# Altium PCB PCB.PcbDoc
Units mm, origin at the board's own origin, x right, y up, seen from the top; angles counter-clockwise.
Board outline 34 x 27 mm, 4 copper layers (L1 (SIGNAL), L2 (GND), L3 (GND), L4 (SINGAL)), stack 1.57 mm thick; 33 components, 27 nets, 149 pads, 60 vias.
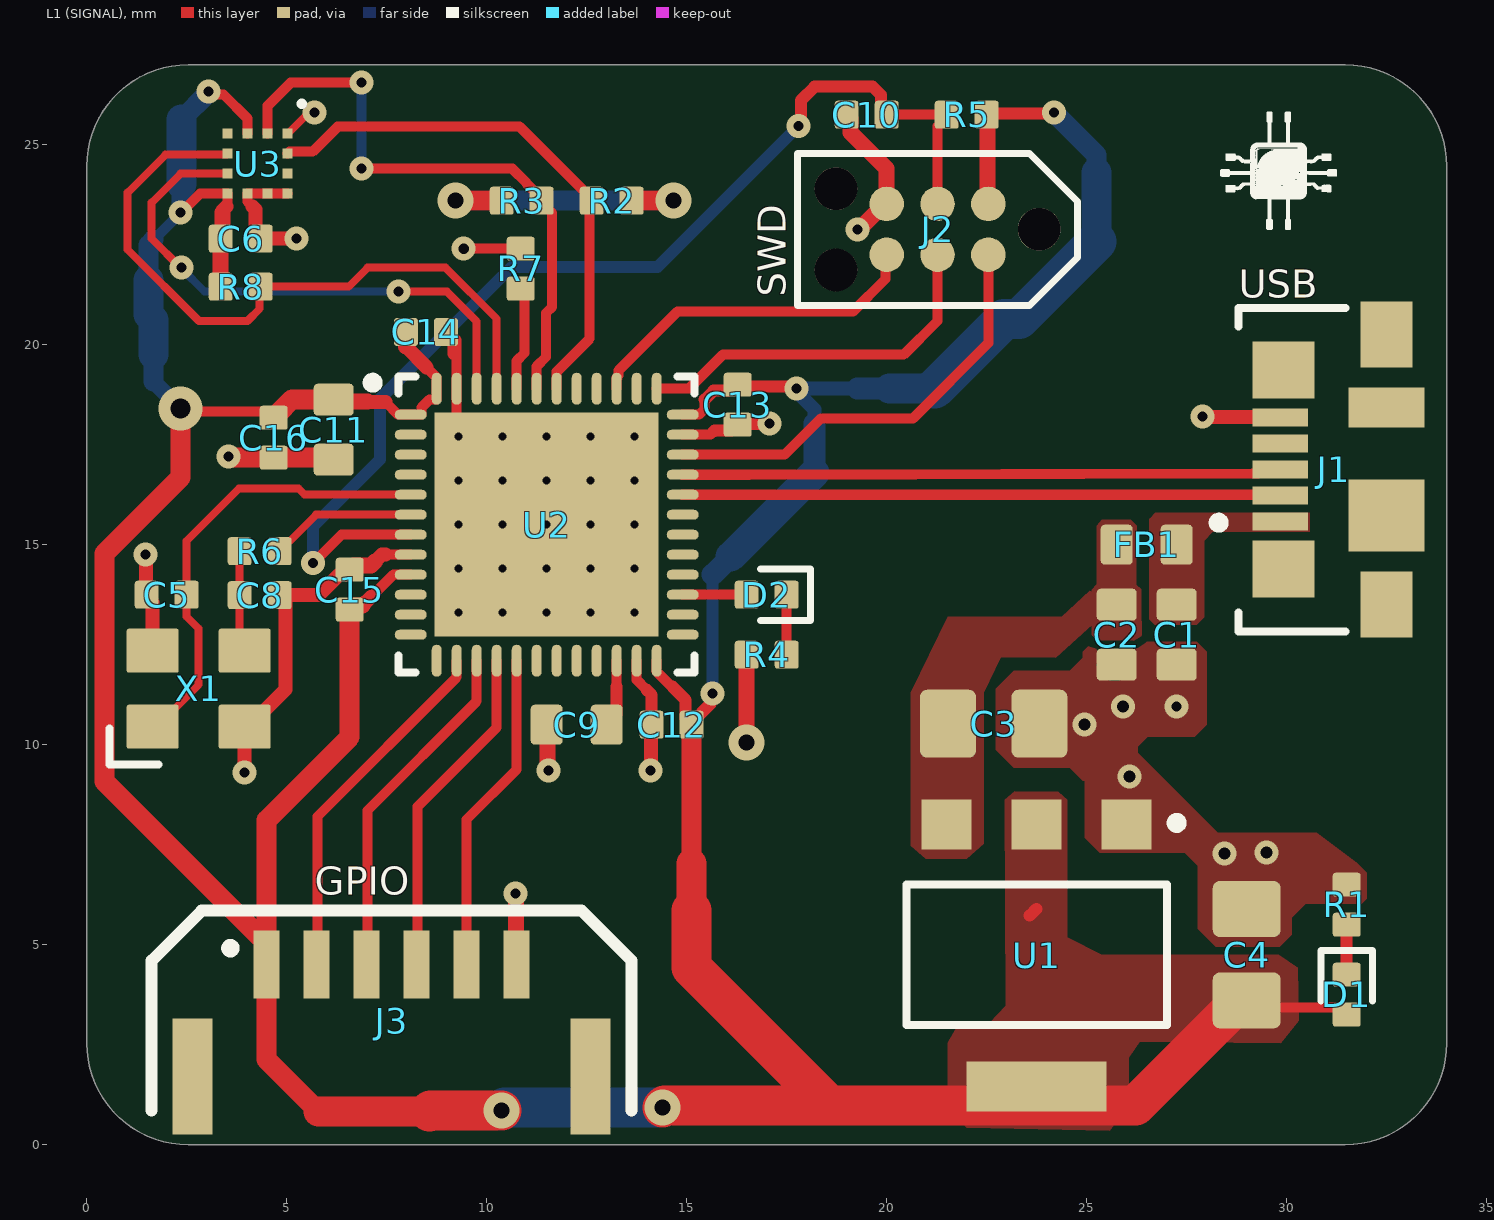
[diagram p0: L1 (SIGNAL) view]
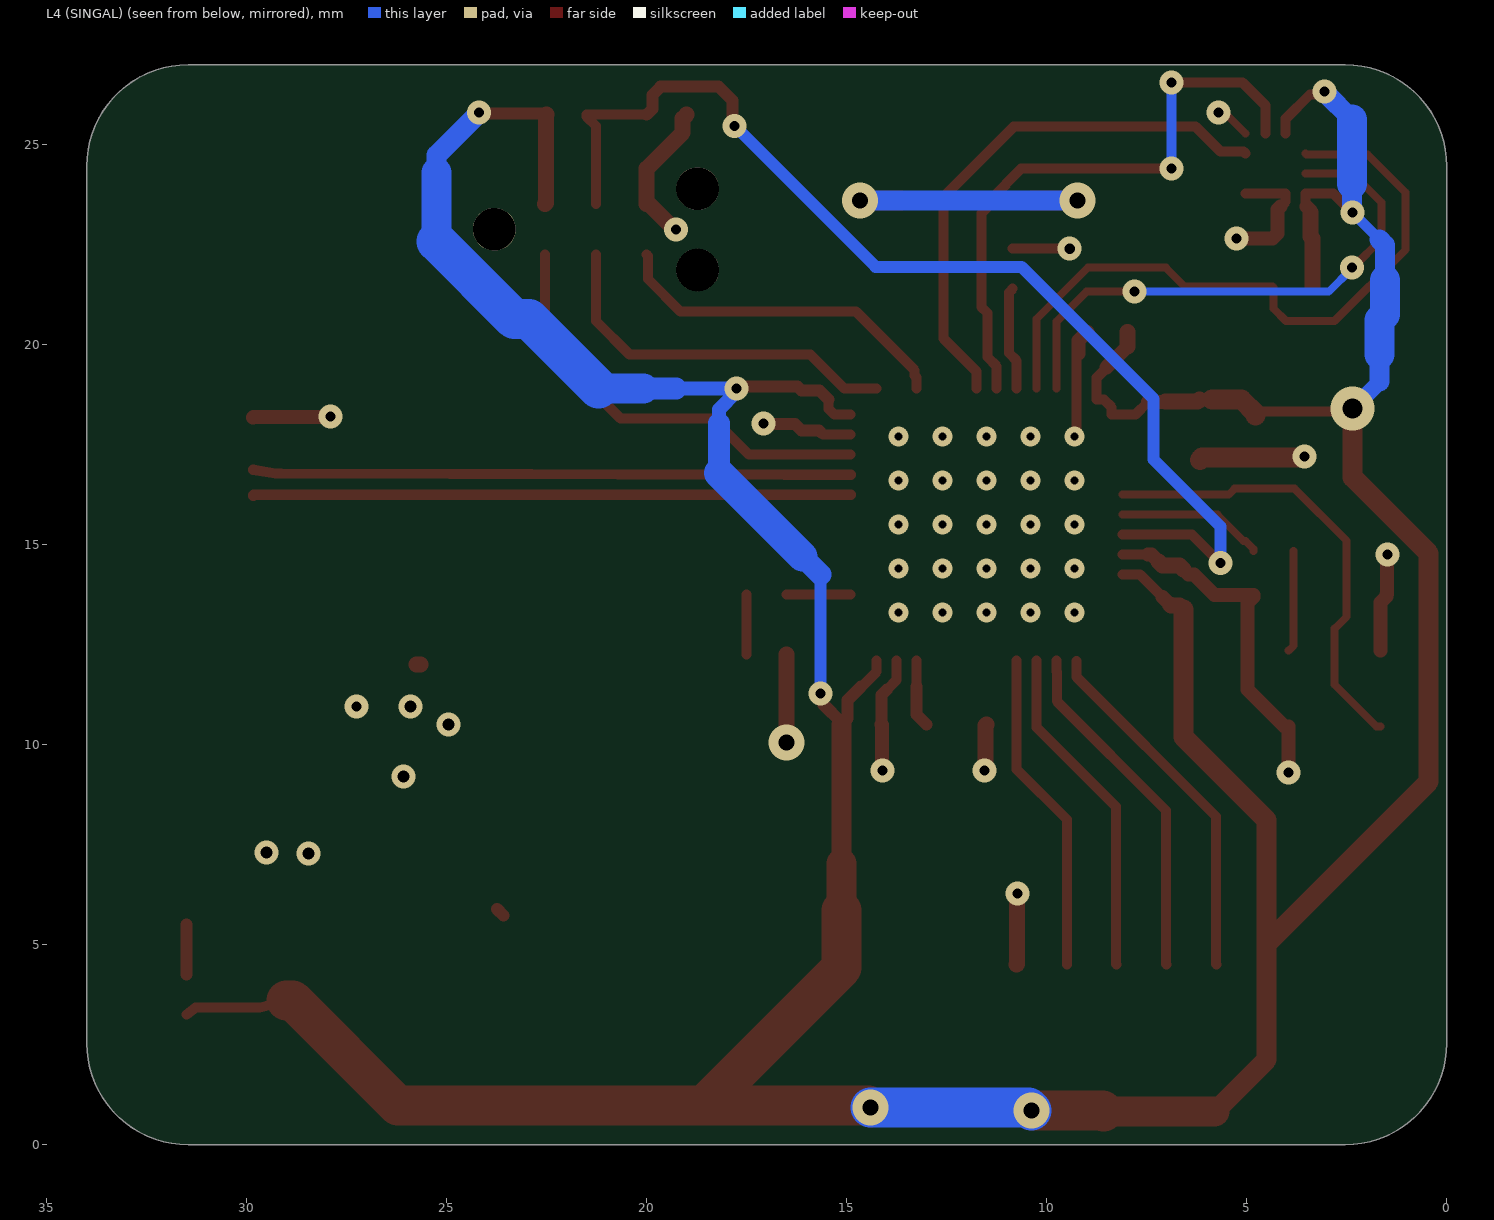
[diagram p1: L4 (SINGAL) view, seen from below]
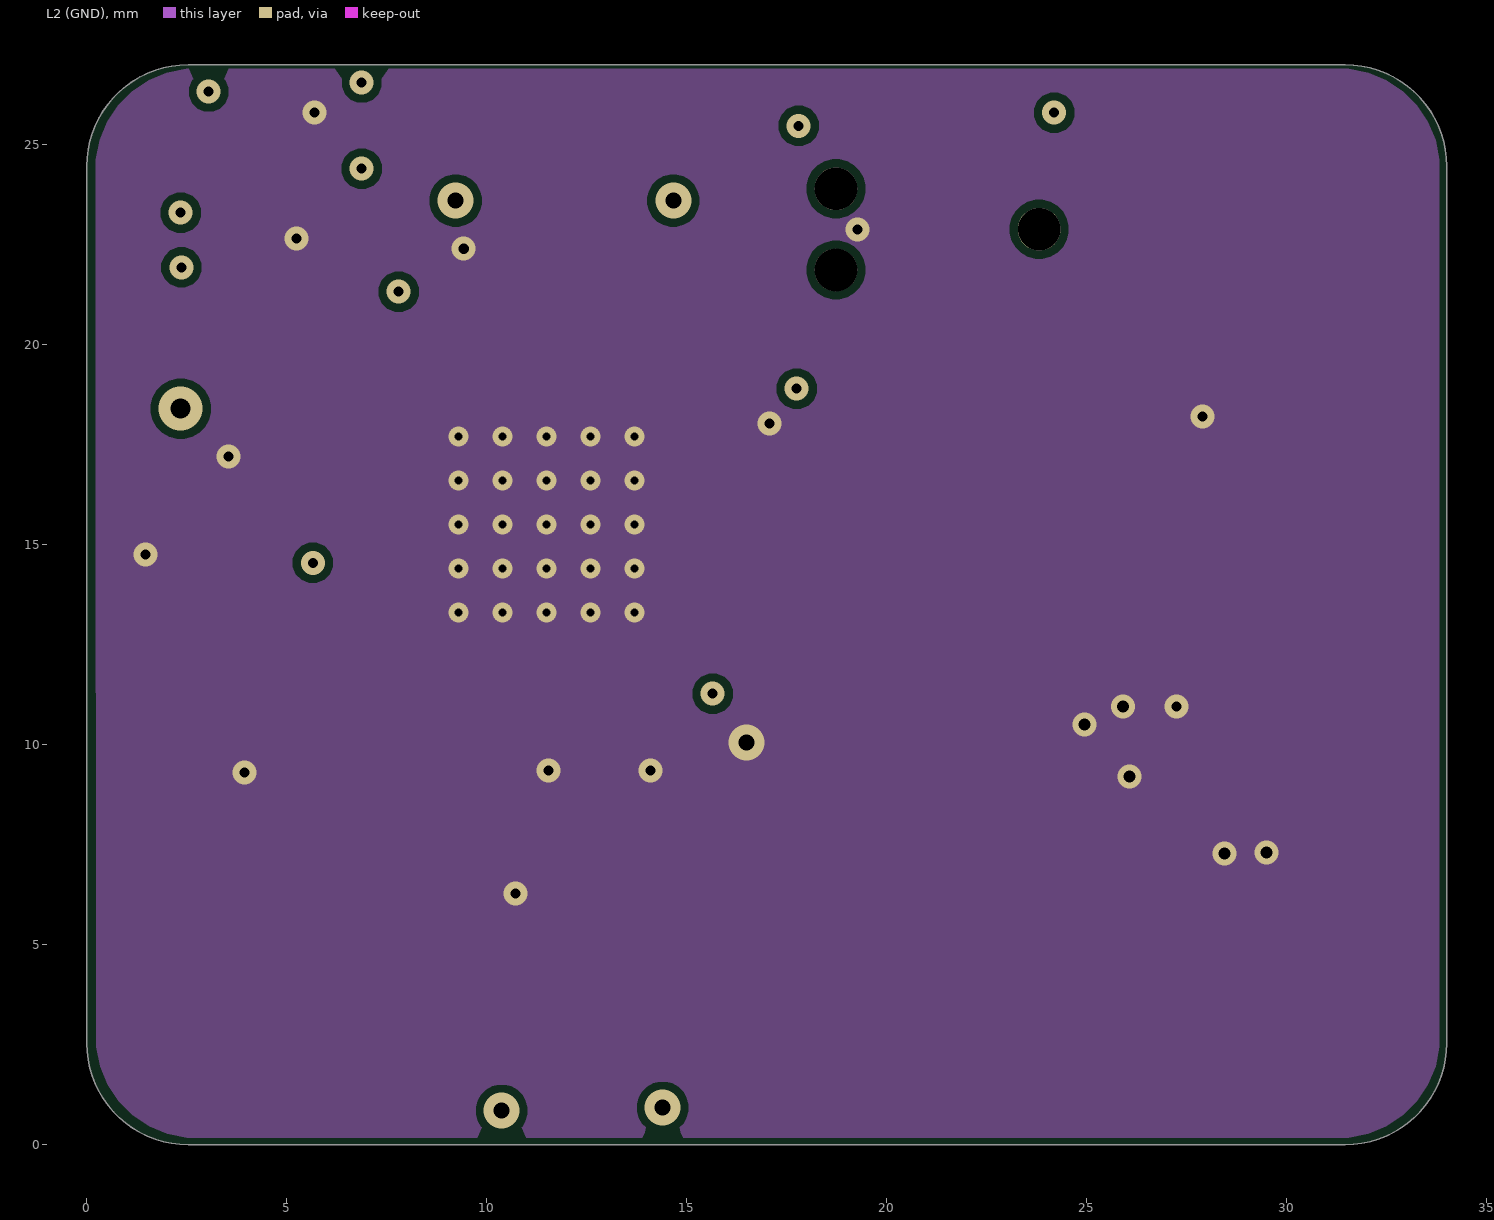
[diagram p2: L2 (GND)]
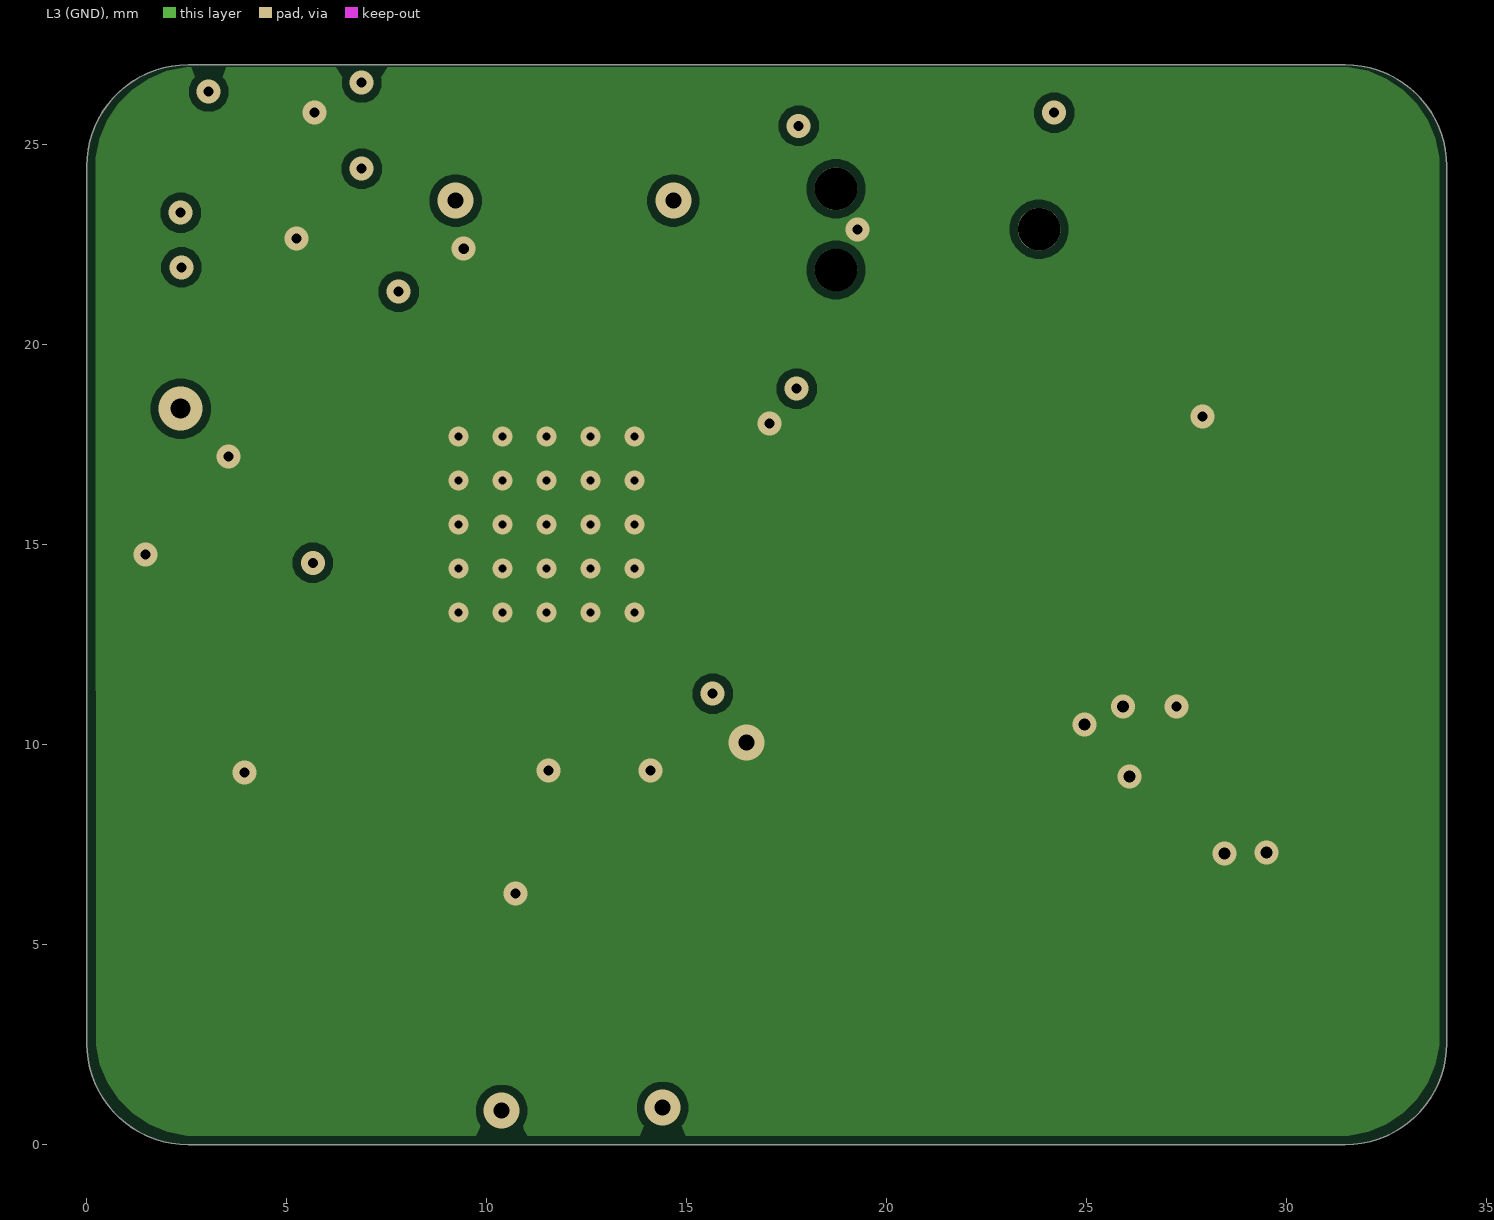
[diagram p3: L3 (GND)]
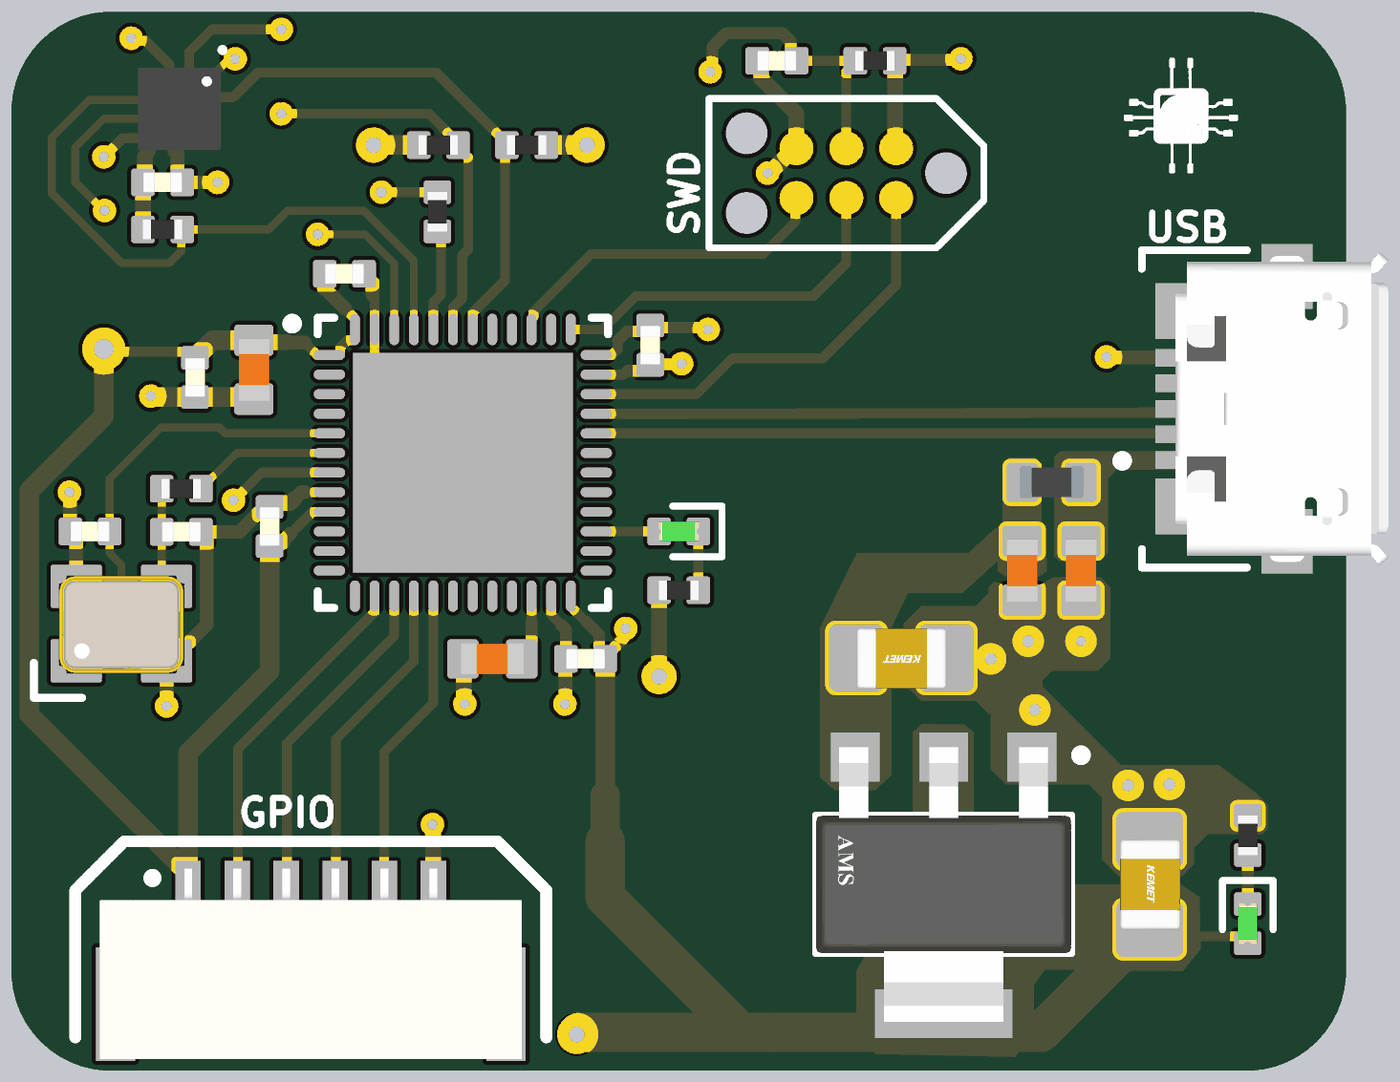
[diagram p4: 3D render of the assembled board from above, using the file's embedded part models]

## Layer stack, top to bottom
Top Solder: solder mask 0.0254, SM-001, Dk 4
L1 (SIGNAL): signal copper 0.035
Dielectric 1: prepreg 0.2, PP-017, Dk 4.6
L2 (GND): signal copper 0.0175
Dielectric 3: core 1.065, Core-039, Dk 4.6
L3 (GND): signal copper 0.0175
Dielectric 5: prepreg 0.2, PP-017, Dk 4.6
L4 (SINGAL): signal copper 0.035
Bottom Solder: solder mask 0.0254, SM-001, Dk 4

## Board outline
0,24.46 cw(c2.54,24.46) 2.54,27 31.46,27 cw(c31.46,24.46) 34,24.46 34,2.54 cw(c31.46,2.54) 31.46,0 2.54,0 cw(c2.54,2.54) 0,2.54

## Design rules (kind name [scope] priority, off if disabled: settings)
Clearance [All] p1: gap=0.2 ignorepadtopadclearanceinfootprint=FALSE
DiffPairsRouting [All] p1: maxlimit=0.254 minlimit=0.203 mostfreqgap=0.254 toplayer_maxgap=0.203 toplayer_prefgap=0.203 toplayer_minwidth=0.26 toplayer_maxwidth=0.26 toplayer_prefwidth=0.26 bottomlayer_maxgap=0.203 bottomlayer_prefgap=0.203 bottomlayer_minwidth=0.26 bottomlayer_maxwidth=0.26 bottomlayer_prefwidth=0.26 impedanceprofiledriven=TRUE impedanceprofileid={047612C2-1A66-4979-9F46-730870381391} impedanceprofilevalue=90.000000 maxuncoupledlength=12.7
PolygonConnect [All] p1: connectstyle=Direct reliefconductorwidth=0.254 reliefentries=4 polygonreliefangle="90 Angle" airgapwidth=0.254
RoutingVias [All] p1: holewidth=0.3 width=0.7 viastyle="Through Hole" minholewidth=0.25 minwidth=0.55 maxholewidth=0.4 maxwidth=0.9
SolderMaskExpansion [All] p1: expansion=0.102 istentingtop=FALSE
SupplyNets "Schematic Supply Nets_1" [InNet('+3V3')] p1: voltage=0.000
SupplyNets "Schematic Supply Nets_3" [InNet('+5V')] p2: voltage=0.000
SupplyNets "Schematic Supply Nets_2" [InNet('VBUS')] p3: voltage=0.000
SupplyNets "Schematic Supply Nets" [InNet('GND')] p4: voltage=0.000
UnRoutedNet [All] p1: checkbadconnections=TRUE
Width [All] p1: maxlimit=1 minlimit=0.2 preferedwidth=0.3 midlayer1_minwidth=0.254 midlayer1_maxwidth=0.254 midlayer1_prefwidth=0.254 midlayer2_minwidth=0.254 midlayer2_maxwidth=0.254 midlayer2_prefwidth=0.254 minimp=50.000000 maximp=50.000000 favimp=50.000000
28 further rules are at their usual default settings.

## Classes and differential pairs
net class DIFF_USB: USB_D_N USB_D_P
differential pair USB_D: +USB_D_P -USB_D_N

## Components (designator, comment, footprint, x,y, rotation, side; value= is the part's Value field where it differs from the comment)
C1 "2.2u" CAP_0603 27.25,12.75 r90 top
C2 "2.2u" CAP_0603 25.75,12.75 r90 top
C3 "22u" CAP_0805 22.675,10.525 r180 top
C4 "22u" CAP_0805 29,4.75 r270 top
C5 "10p" CAP_0402 2,13.75 r0 top
C6 "100n" CAP_0402 3.85,22.65 r180 top
C8 "10p" CAP_0402 4.325,13.738 r180 top
C9 "2u2" CAP_0603 12.25,10.5 r0 top
C10 "100n" CAP_0402 19.5,25.75 r0 top
C11 "2u2" CAP_0603 6.175,17.875 r90 top
C12 "100n" CAP_0402 14.625,10.5 r0 top
C13 "100n" CAP_0402 16.275,18.5 r90 top
C14 "100n" CAP_0402 8.483,20.319 r180 top
C15 "100n" CAP_0402 6.575,13.875 r270 top
C16 "100n" CAP_0402 4.675,17.675 r90 top
D1 "GREEN" LED_0402_GREEN 31.5,3.75 r90 top
D2 "GREEN" LED_0402_GREEN 17,13.75 r0 top
FB1 "FB0603" FB_0603 26.5,15 r180 top
J1 "473460001" FP-473460001-MFG 32.15,16.875 r90 top
J2 "TC2030-NL" TC2030-NL-FP 21.27,22.885 r180 top
J3 "SM06B-GHS-TB" SM06B-GHS-TB 7.625,3.1 r0 top
R1 "1k" RES_0402 31.5,6 r270 top
R2 "4k7" RES_0402 13.125,23.6 r0 top
R3 "4k7" RES_0402 10.875,23.6 r180 top
R4 "1k" RES_0402 17,12.25 r180 top
R5 "10k" RES_0402 22,25.75 r0 top
R6 "0R" RES_0402 4.325,14.838 r0 top
R7 "10k" RES_0402 10.85,21.9 r270 top
R8 "4k7" RES_0402 3.85,21.45 r180 top
U1 "ams1117" FP-ams1117-IPC_C 23.75,4.75 r270 top
U2 "STM32F411CEU6" STM-UFQFPN48_L 11.5,15.5 r0 top
U3 "498-MC6470" MC6470 4.275,24.525 r270 top
X1 "24MHz" XTAL_3225 2.8,11.4 r0 top

## Footprints (in the part's own frame and the unit in brackets; to place one, negate y for a bottom-side part, rotate by r counter-clockwise, add the part's x,y. Pads: shape width x height; smd on the part's side, far side on the other; paste and mask are expansions set on the pad)
CAP_0402 [mm]
  rrect25% 0.6x0.7 smd: 1(-0.5,0) 2(0.5,0)
  body extent -0.5,-0.26 0.5,0.26, height 0.37
CAP_0603 [mm]
  rrect25% 0.8x1 smd: 1(-0.75,0) 2(0.75,0)
  body extent -0.8,-0.4 0.8,0.4, height 0.51
CAP_0805 [mm]
  rrect25% 1.4x1.7 smd: 1(-1.143,0) 2(1.143,0)
  body extent -1.15,-0.76 1.15,0.79, height 1.01
FB_0603 [mm]
  rrect25% 0.8x1 smd: 1(-0.75,0) 2(0.75,0)
  body extent -0.8,-0.4 0.8,0.4, height 0.81
FP-473460001-MFG [mm]
  rect 0.45x1.38 smd paste+0 mask+0: 1(-1.3,2.31) 2(-0.65,2.31) 3(0,2.31) 4(0.65,2.31) 5(1.3,2.31)
  rect 1.425x1.55 smd paste+0 mask+0: 6(-2.488,2.225) 7(2.488,2.225)
  rect 1.65x1.3 smd paste+0 mask+0: 8(-3.375,-0.35) 11(3.375,-0.35)
  rect 1.8x1.9 smd paste+0 mask+0: 9(-1.15,-0.35)
  rect 1x1.9 smd paste+0 mask+0: 10(1.55,-0.35)
  silkscreen extent -4.05,0.67 4.05,3.97, body extent -4.3,-2.48 4.3,3.45, height 0.25
FP-ams1117-IPC_C [mm]
  rect 1.25x1.25 smd paste+0 mask+0: 1(-3.25,2.25) 2(-3.25,0) 3(-3.25,-2.25)
  rect 1.25x3.5 smd paste+0 mask+0: 4(3.295,0)
  silkscreen extent -3.42,-3.25 1.75,3.63, body extent -3.9,-3.35 3.9,3.35, height 0.25
LED_0402_GREEN [mm]
  rrect25% 0.6x0.7 smd: A(-0.5,0) K(0.5,0)
  silkscreen extent -0.15,-0.65 1.1,0.65, body extent -0.51,-0.25 0.51,0.25, height 0.45
MC6470 [mm] "LGA, 12-Leads, Body 2,00x2,00mmx0,13mm, Pitch 0,50mm"
  rect 0.25x0.25 smd: 1(-0.75,0.75) 2(-0.75,0.25) 3(-0.75,-0.25) 4(-0.75,-0.75) 5(-0.25,-0.75) 6(0.25,-0.75) 7(0.75,-0.75) 8(0.75,-0.25) 9(0.75,0.25) 10(0.75,0.75) 11(0.25,0.75) 12(-0.25,0.75)
  silkscreen extent -1.5,1.1 -1.5,1.1, body extent -1.05,-1.05 1.05,1.05, height 0.13
RES_0402 [mm]
  rrect25% 0.6x0.7 smd: 1(-0.5,0) 2(0.5,0)
  body extent -0.5,-0.25 0.5,0.25, height 0.3
SM06B-GHS-TB [mm]
  rect 0.65x1.7 smd: 1(-3.125,1.4) 2(-1.875,1.4) 3(-0.625,1.4) 4(0.625,1.4) 5(1.875,1.4) 6(3.125,1.4)
  rect 1x2.9 smd: ""(-4.975,-1.4) ""(4.975,-1.4)
  silkscreen extent -6,-2.25 6,2.75, body extent -5.38,-2.8 5.38,2.05, height 4.26
STM-UFQFPN48_L [mm] "QFN, 48-Leads, Body 7.1x7.1mm, Pitch 0.5mm, Thermal Pad 5.6x5.6mm, IPC High Density"
  oval 0.8x0.25 smd: 1(-3.4,2.75) 2(-3.4,2.25) 3(-3.4,1.75) 4(-3.4,1.25) 5(-3.4,0.75) 6(-3.4,0.25) 7(-3.4,-0.25) 8(-3.4,-0.75) 9(-3.4,-1.25) 10(-3.4,-1.75) 11(-3.4,-2.25) 12(-3.4,-2.75) 25(3.4,-2.75) 26(3.4,-2.25) 27(3.4,-1.75) 28(3.4,-1.25) 29(3.4,-0.75) 30(3.4,-0.25) 31(3.4,0.25) 32(3.4,0.75) 33(3.4,1.25) 34(3.4,1.75) 35(3.4,2.25) 36(3.4,2.75)
  oval 0.25x0.8 smd: 13(-2.75,-3.4) 14(-2.25,-3.4) 15(-1.75,-3.4) 16(-1.25,-3.4) 17(-0.75,-3.4) 18(-0.25,-3.4) 19(0.25,-3.4) 20(0.75,-3.4) 21(1.25,-3.4) 22(1.75,-3.4) 23(2.25,-3.4) 24(2.75,-3.4) 37(2.75,3.4) 38(2.25,3.4) 39(1.75,3.4) 40(1.25,3.4) 41(0.75,3.4) 42(0.25,3.4) 43(-0.25,3.4) 44(-0.75,3.4) 45(-1.25,3.4) 46(-1.75,3.4) 47(-2.25,3.4) 48(-2.75,3.4)
  rect 5.6x5.6 smd: 49(0,0)
  silkscreen extent -4.47,-3.7 3.7,3.7, body extent -3.55,-3.55 3.55,3.55, height 0.6
TC2030-NL-FP [mil]
  round 33.98 smd paste-16.99: 1(-50,-25) 2(-50,25) 3(0,-25) 4(0,25) 5(50,-25) 6(50,25)
  round 42.01 hole 42.01 unplated: MH(-100,0) MH(100,-40) MH(100,40)
  silkscreen extent -138,-75 138,75
XTAL_3225 [mm]
  rrect10% 1.3x1.1 smd: 1(-1.15,-0.95) 2(1.15,-0.95) 3(1.15,0.95) 4(-1.15,0.95)
  silkscreen extent -2.23,-1.89 -1,-1, body extent -1.6,-1.28 1.6,1.22, height 0.61

## Part data
C1 C2 C9 C11: library part CAP_0603, "Capacitor SMD 0603"
C3 C4: library part CAP_0805, "Capacitor SMD 0805"
C5 C6 C8 C10 C12 C13 C14 C15 C16: library part CAP_0402, "Capacitor SMD 0402"
D1 D2: library part LED_0402_GREEN, "LED 0402 GREEN SMD"
FB1: library part FB_0603, "Ferrite Bead SMD 0603"
J1: library part CMP-2000-05246-2, "CONN RCPT USB2.0 MICRO B SMD R/A", Current Rating=1.8A, Manufacturer=Molex, Package=0, Temperature="-30°C to +85°C", Temperature Range High=+85°C, Temperature Range Low=-30°C, Voltage Rating=30V, Automotive=No, Category=Conn, ComponentLink2Description=Datasheet, ComponentLink2URL=https://www.molex.com/webdocs/datasheets/pdf/en-us/0473460001_IO_CONNECTORS.pdf, Conn Orientation="Right Angle", Contact Material=Gold,Nickel, Device Class L1=Connectors, Device Class L2="USB Connectors", Device Class L3=unset, Digikey Description="CONN RCPT USB2.0 MICRO B SMD R/A", Footprint Url=https://www.molex.com/pdm_docs/sd/473460001_sd.pdf, Height=2.945mm, Lead Free=Yes, Manufacturer Part Number=473460001, Number Of Contacts=5, Octopart=https://octopart.com/47346-0001-molex-7164928, Pitch=0.65mm, RoHS=TRUE, Shielding=true, Usb Standard="USB 2.0", Is Female=yes
J2: "Tag-Connect No-Solder SWD Debug Connector (No Legs) DO NOT PLACE", Manufacturer=Tag-Connect, Manufacturer Part Number=TC2030-NL-FP
J3: "Header Connector 6 Position 1.25MM Pitch SMD Horizontal JST GH", Manufacturer=JST, Manufacturer Part Number=SM06B-GHS-TB
R1 R2 R3 R4 R5 R6 R7 R8: library part RES_0402, "Resistor SMD 0402"
U1: library part CMP-209535-000002-1, "1A LOW DROPOUT VOLTAGE REGULATOR", RoHS Compliant=Yes
U2: library part CMP-0243-00165-1, "ARM Cortex-M4 32-bit MCU+FPU, 512 KB Flash, 128 KB RAM, 36 I/Os, 48-Pin UFQFPN, -40 to 85 degC, Tray", Operating Frequency(F) (Processor speed) (MHz)=100, Package Description=UFQFPN48, Package Reference="48-Pin Ultra Thin Fine Pitch Quad Flat No-Lead, 7 x 7 x 0.6 mm Body, 0.5 mm Pitch, Exposed Pad", Supply Voltage(Vcc) min (V)=1.7, I/Os (High Current)=36, ComponentLink1Description="Manufacturer URL", ComponentLink1URL=http://www.st.com/, ComponentLink2Description=Datasheet, ComponentLink2URL=http://www.st.com/st-web-ui/static/active/en/resource/technical/document/datasheet/DM00115249.pdf, Core="ARM Cortex-M4", DatasheetVersion="Rev. 6", FLASH Size (Prog) (kB)=512, Mounting Technology="Surface Mount", Packing=Tray, Internal RAM Size (kB)=128
U3: library part MC6470, "IMUs - Inertial Measurement Units 8g, 14-Bit Output 6-Axis eCompass"
X1: library part TSX-3225_24.0000MF15X-AC, "Crystal SMD 24MHz 10PPM 7pF 3225", Manufacturer=Epson, Manufacturer Part Number="TSX-3225 24.0000MF15X-AC"

## Via types
v1: diameter 0.5, hole 0.2, L1 (SIGNAL) to L4 (SINGAL), 25 vias
v2: diameter 0.6, hole 0.25, L1 (SIGNAL) to L4 (SINGAL), 22 vias
v3: diameter 0.9, hole 0.4, L1 (SIGNAL) to L4 (SINGAL), 5 vias
v4: diameter 0.6, hole 0.3, L1 (SIGNAL) to L4 (SINGAL), 5 vias
v5: diameter 0.6, hole 0.27, L1 (SIGNAL) to L4 (SINGAL), 1 vias
v6: diameter 1.1, hole 0.5, L1 (SIGNAL) to L4 (SINGAL), 1 vias
v7: diameter 0.6/0.6/0.6/0.6 (per signal layer), hole 0.25, L1 (SIGNAL) to L4 (SINGAL), 1 vias

## Nets (pads, with @x,y where several pads share a name; then routed paths per layer and width w, separated by ;. In a path a pad name is that pad's centre, name@x,y a point inside that pad or via, vN(x,y) a via of type N, cw(c..) or ccw(c..) an arc to the next point about the centre after c; other vN are vias at no path point)
+3V3: C4.2 C6.2 C11.2 C12.2 C13.2 C14.2 C15.2 C16.2 D1.A J2.1 J3.1 R5.2 R8.2 U1.2 U1.4 U2.1 U2.9 U2.24 U2.36 U2.48 U3.3 U3.7 | length 124.6
  L1 (SIGNAL) w0.25: v6(2.35,18.4) 2.417,18.333 4.667,18.333 C16.2@4.775,18.225 ; v2(2.35,23.3) 2.355,23.3 2.83,23.775 U3.7 3.525,23.475 3.5,23.45 ; v2(3.05,26.325) 3.117,26.258 3.417,26.258 4.025,25.65 U3.3 ; 7.102,13.688 7.663,14.25 U2.9 ; 7.469,18.567 7.785,18.25 U2.1 8.375,18.25 8.375,18.435 8.565,18.625 8.75,18.625 U2.48 8.75,19.175 8.55,19.375 8.55,19.386 8.5,19.436 ; U2.24 14.25,11.825 14.625,11.45 ; U2.36 15.304,18.25 15.45,18.396 15.45,18.625 ; C4.2 29.675,3.425 31.275,3.425 D1.A
  L1 (SIGNAL) w0.3: 14.644,11.45 14.975,11.119 14.975,10.65 C12.2 ; C12.2@15.125,10.55 15.593,11.018 15.593,11.218 v2(15.65,11.275) ; 15.45,18.625 15.675,18.85 16.125,18.85 16.225,18.95 17.7,18.95 v2(17.75,18.9) ; R5.2 22.525,25.775 24.162,25.775 v2(24.187,25.8) ; 23.575,5.725 23.743,5.893
  L1 (SIGNAL) w0.35: 3.4,23.3 3.4,23.35 3.5,23.45 ; C15.2@6.913,13.5 7.102,13.688 ; 7.033,18.567 7.469,18.567 ; 7.983,19.954 8.5,19.436
  L1 (SIGNAL) w0.4: R8.2 C6.2 3.4,22.7 3.4,23.3 ; C11.2 6.225,18.575 7.025,18.575 ; C15.2 6.675,13.475 6.888,13.475 C15.2@6.913,13.5 ; 7.983,19.954 C14.2 ; R5.2 22.52,25.73 22.52,23.54 J2.1
  L1 (SIGNAL) w0.5: v6(2.35,18.4) 2.35,16.686 0.45,14.786 0.45,9.075 J3.1@4.5,5.025 ; C16.2@4.775,18.225 4.775,18.275 5.129,18.629 C11.2@5.871,18.629 ; 5.8,0.825 4.5,2.125 J3.1 J3.1@4.5,5.025 ; C15.2 6.575,10.188 4.5,8.112 J3.1@4.5,5.025 ; 15.125,7.025 C12.2
  L1 (SIGNAL) w0.75: 5.8,0.825 8.575,0.825 ; 15.125,5.85 15.125,7.025
  L1 (SIGNAL) w1: 8.575,0.825 8.6,0.85 v3(10.375,0.85) ; v3(14.4,0.925) 14.45,0.975 18.575,0.975 ; 15.125,5.85 15.125,4.425 18.575,0.975 ; C4.2 28.85,3.607 26.218,0.975 18.575,0.975
  L4 (SINGAL) w0.25: 1.675,22.625 v2(2.35,23.3)
  L4 (SINGAL) w0.3: v2(15.65,11.275) 15.65,14.25
  L4 (SINGAL) w0.35: 18.196,18.025 18.196,18.386 17.75,18.832 v2(17.75,18.9) 19.264,18.9
  L4 (SINGAL) w0.4: 1.675,19.075 v6(2.35,18.4)
  L4 (SINGAL) w0.5: 1.544,21.619 1.544,22.494 1.675,22.625 ; 1.675,19.075 1.675,19.75 ; v2(2.35,23.3) 2.369,23.319 2.369,24.019 ; 2.369,25.629 3.05,26.31 v2(3.05,26.325) ; v2(24.187,25.8) 25.25,24.737 25.25,24.3
  L4 (SINGAL) w0.55: 15.65,14.25 16.1,14.7 ; 18.196,16.796 18.196,18.025 ; 19.264,18.9 20.075,18.9
  L4 (SINGAL) w0.75: 1.544,21.619 1.544,20.75 1.675,20.619 1.675,19.75 ; 2.369,24.019 2.369,25.629 ; 16.1,14.7 18.196,16.796 ; 20.075,18.9 21.2,18.9 ; 25.25,22.581 25.25,24.3
  L4 (SINGAL) w1: v3(10.375,0.85) 10.45,0.925 v3(14.4,0.925) ; 21.2,18.9 22.937,20.637 23.306,20.637 25.25,22.581
+5V: C2.2 C3.2 FB1.2 U1.3
GND: C1.1 C2.1 C3.1 C4.1 C5.1 C6.1 C8.1 C9.1 C10.1 C11.1 C12.1 C13.1 C14.1 C15.1 C16.1 J1.5 J2.5 J3.6 R1.1 R4.2 R7.1 U1.1 U2.8 U2.23 U2.35 U2.47 U2.49 U3.1 U3.8 U3.9 U3.10 X1.2 X1.4 | length 37.9
  L1 (SIGNAL) w0.2: U3.1 5.473,25.723 5.623,25.723 v2(5.7,25.8)
  L1 (SIGNAL) w0.25: 4.15,23.45 4.025,23.575 U3.8 U3.9 U3.10 ; 7.469,14.75 U2.8 ; 9.2,19.786 9.25,19.736 U2.47 9.25,17.75 v1(9.3,17.7) ; v5(9.425,22.4) R7.1 ; U2.23 13.75,11.622 13.996,11.376 ; U2.35 15.597,17.75 15.673,17.827
  L1 (SIGNAL) w0.3: 13.996,11.376 14.125,11.247 C12.1 ; 15.673,17.827 15.697,17.85 16.125,17.85 C13.1 16.288,18.013 17.063,18.013 v2(17.075,18.025)
  L1 (SIGNAL) w0.35: v2(1.475,14.75) 1.488,14.737 1.488,13.762 C5.1 ; C5.1@1.5,13.7 1.65,13.55 X1.4 ; v2(3.95,9.3) X1.2 ; X1.2@4.05,10.45 4.975,11.375 4.975,13.538 4.825,13.688 C8.1 5.802,13.738 6.314,14.25 6.45,14.25 C15.1 ; 4.15,23.45 4.225,23.375 4.225,22.775 C6.1 v2(5.25,22.65) ; 7.209,14.583 7.377,14.75 7.469,14.75 ; C14.1 9.2,20.101 9.2,19.786 ; v2(14.1,9.35) 14.112,9.362 14.112,10.488 C12.1 ; v2(27.9,18.2) 27.912,18.187 29.827,18.187 J1.5
  L1 (SIGNAL) w0.4: C15.1 6.675,14.475 7.102,14.475 7.209,14.583 ; v2(10.725,6.275) 10.737,6.262 10.737,4.513 J3.6 ; C9.1 11.525,10.475 11.525,9.375 v2(11.55,9.35) ; v3(16.5,10.05) R4.2 ; C10.1 19.1,25.65 19.1,25.3 20,24.4 J2.5 19.949,23.52 19.314,22.885 v2(19.264,22.885) ; C2.1@25.65,12 C2.1
  L1 (SIGNAL) w0.5: v2(3.55,17.2) ccw(c3.575,17.2) 3.575,17.175 C16.1 6.12,17.175 C11.1@6.172,17.122
  other v1: 9.3,13.3 10.4,13.3 11.5,13.3 12.6,13.3 13.7,13.3 9.3,14.4 10.4,14.4 11.5,14.4 12.6,14.4 13.7,14.4 9.3,15.5 10.4,15.5 11.5,15.5 12.6,15.5 13.7,15.5 9.3,16.6 10.4,16.6 11.5,16.6 12.6,16.6 13.7,16.6 10.4,17.7 11.5,17.7 12.6,17.7 13.7,17.7
  other v2: 27.25,10.95
  other v4: 28.45,7.275 29.5,7.3 26.075,9.2 24.95,10.5 25.906,10.95
LED_PWR_K: D1.K R1.2 | length 1.2
  L1 (SIGNAL) w0.3: D1.K R1.2
MCU_BOOT0: R7.2 U2.44 | length 2.6
  L1 (SIGNAL) w0.25: U2.44 10.75,19.598 10.943,19.791 10.943,21.307 R7.2
MCU_INTA: R8.1 U2.45 U3.5 | length 17.4
  L1 (SIGNAL) w0.2: U3.5 3.5,24.75 1.975,24.75 1.025,23.8 1.025,22.375 2.806,20.594 4.019,20.594 4.325,20.9 4.325,21.425 R8.1 6.549,21.45 7.024,21.925 8.972,21.925 10.25,20.647 U2.45
MCU_INTM: U2.46 U3.6 | length 13.8
  L1 (SIGNAL) w0.2: v2(2.369,21.932) 2.343,21.932 1.625,22.65 1.625,23.55 2.35,24.275 U3.6 ; v7(7.8,21.325) 9.007,21.325 9.75,20.582 U2.46
  L4 (SINGAL) w0.2: v2(2.369,21.932) 2.369,21.906 2.95,21.325 v7(7.8,21.325)
MCU_LED_A: D2.A U2.27 | length 1.6
  L1 (SIGNAL) w0.25: U2.27 D2.A
MCU_LED_K: D2.K R4.1 | length 1.5
  L1 (SIGNAL) w0.25: R4.1 D2.K
MCU_NRST: C10.2 J2.3 R5.1 U2.7 | length 28.1
  L1 (SIGNAL) w0.25: v2(5.656,14.547) 5.667,14.547 6.37,15.25 U2.7 ; C10.2 R5.1 21.5,25.7 21.27,25.47 J2.3
  L1 (SIGNAL) w0.3: v2(17.8,25.47) 17.857,25.527 17.857,26.107 18.2,26.45 19.65,26.45 19.854,26.246 19.854,25.896 C10.2
  L4 (SINGAL) w0.3: v2(5.656,14.547) 5.661,14.552 5.661,15.458 7.328,17.125 7.328,18.643 10.629,21.945 14.275,21.945 v2(17.8,25.47)
MCU_OSC_IN: C5.2 U2.5 X1.1 | length 11.5
  L1 (SIGNAL) w0.2: X1.1 1.75,10.45 2.8,11.5 2.8,12.9 2.5,13.2 C5.2 2.5,15.097 3.803,16.4 5.3,16.4 5.45,16.25 U2.5
MCU_OSC_OUT: R6.2 U2.6 | length 3.7
  L1 (SIGNAL) w0.2: R6.2 4.825,14.888 5.025,15.088 5.075,15.088 5.737,15.75 U2.6
MCU_PA4: J3.2 U2.14 | length 9
  L1 (SIGNAL) w0.25: J3.2 5.768,4.518 5.768,8.207 9.25,11.689 U2.14@9.25,12.09
MCU_PA5: J3.3 U2.15 | length 8.7
  L1 (SIGNAL) w0.25: J3.3 7.016,4.516 7.016,8.355 9.748,11.087 9.748,11.823 9.75,11.825 U2.15
MCU_PA6: J3.4 U2.16 | length 8.4
  L1 (SIGNAL) w0.25: J3.4 8.266,4.516 8.266,8.45 10.25,10.433 U2.16
MCU_PA7: J3.5 U2.17 | length 8.1
  L1 (SIGNAL) w0.25: J3.5@9.495,4.505 9.495,8.128 10.75,9.383 U2.17
MCU_SCL: R2.1 U2.42 U3.12 | length 13.7
  L1 (SIGNAL) w0.25: U3.12 5.075,24.825 5.65,24.825 6.275,25.45 10.825,25.45 12.575,23.7 12.575,20.15 11.75,19.325 U2.42
MCU_SDA: R3.1 U2.43 U3.2 | length 15.3
  L1 (SIGNAL) w0.25: U3.2 4.525,25.975 5.1,26.55 v2(6.875,26.55) ; v2(6.875,24.4) 10.641,24.4 11,24.041 11,24.025 11.375,23.65 R3.1 11.375,23.55 11.636,23.289 11.636,20.945 11.483,20.793 11.483,19.695 11.25,19.461 U2.43
  L4 (SINGAL) w0.25: v2(6.875,24.4) v2(6.875,26.55)
MCU_SWCLK: J2.4 U2.37 | length 9.4
  L1 (SIGNAL) w0.25: U2.37 15.053,18.9 15.903,19.75 20.425,19.75 21.27,20.595 J2.4
MCU_SWDIO: J2.2 U2.34 | length 11
  L1 (SIGNAL) w0.25: U2.34 17.447,17.25 18.358,18.162 20.662,18.162 22.54,20.04 J2.2
MCU_SWO: J2.6 U2.39 | length 8.7
  L1 (SIGNAL) w0.25: U2.39 13.25,19.175 13.3,19.225 13.3,19.361 14.764,20.825 19.152,20.825 19.968,21.641 19.968,22.218 J2.6
MCU_VCAP1: C9.2 U2.22 | length 1.7
  L1 (SIGNAL) w0.25: 13.25,11.45 U2.22
  L1 (SIGNAL) w0.3: C9.2 13.25,10.75 13.25,11.45
USB_D_N: J1.2 U2.32 | length 15
  L1 (SIGNAL) w0.26: U2.32 29.815,16.25 cw(c29.815,16.225) J1.2
USB_D_P: J1.3 U2.33 | length 14.9
  L1 (SIGNAL) w0.26: U2.33 15.998,16.745 ccw(c16,17.15) 16,16.745 16.55,16.745 29.149,16.78 ; 29.15,16.78 29.28,16.78 J1.3
VBUS: C1.2 FB1.1 J1.1
VDD_IO: R2.2 R3.2 | length 7.6
  L1 (SIGNAL) w0.5: v3(9.225,23.6) R3.2 ; R2.2 v3(14.664,23.6)
  L4 (SINGAL) w0.5: v3(9.225,23.6) v3(14.664,23.6)
XTAL_IN: C8.2 R6.1 X1.3 | length 2.5
  L1 (SIGNAL) w0.2: R6.1 C8.2 3.825,12.475 X1.3
pads on no net: J1.4 J1.6 J1.7 J1.8 J1.9 J1.10 J1.11 J2.MH J3. U2.2 U2.3 U2.4 U2.10 U2.11 U2.12 U2.13 U2.18 U2.19 U2.20 U2.21 U2.25 U2.26 U2.28 U2.29 U2.30 U2.31 U2.38 U2.40 U2.41 U3.4 U3.11

## Polygon pours and split planes (outlines as drawn)
GND on L1 (SIGNAL) "GND_L01_P014" (solid, pour order 14): 31.75,7.05 32,6.8 32,6.15 31.875,6.025 30.475,6.025 30.125,5.675 30.125,5.25 29.825,4.95 28.225,4.95 27.775,5.4 27.775,6.975 27.45,7.3 25.325,7.3 24.95,7.675 24.95,9.1 24.9,9.1 24.575,9.425 23.175,9.425 22.725,9.875 22.725,11.4 23.175,11.85 24.575,11.85 24.9,12.175 24.9,12.325 25.15,12.575 27.75,12.575 28,12.325 28,10.5 27.7,10.2 26.525,10.2 26.275,9.95 26.275,9.8 28.275,7.8 30.75,7.8
+5V on L1 (SIGNAL) "+5V_L01_P005" (solid, pour order 5): 26.251,15.501 26.128,15.623 25.381,15.623 25.377,15.627 25.252,15.503 25.25,15.503 25.25,14.009 25.251,14.007 25.124,13.88 25.124,11.625 25.129,11.625 25.254,11.5 26.251,11.5 26.251,11.512 26.381,11.641 26.381,13.878 26.37,13.878 26.244,14.005
+3V3 on L1 (SIGNAL) "+3V3_L01_P009" (solid, pour order 9): 23.197,8.841 22.955,8.629 22.975,3.475 22.575,3.05 21.8,3.025 21.525,2.55 21.525,0.975 22,0.425 25.575,0.35 26.05,1 26.05,2.175 26.325,2.575 29.85,2.54 30.3,3.1 30.275,4.425 29.799,4.75 25.375,4.75 24.518,5.193 24.518,8.625 24.288,8.828
+5V on L1 (SIGNAL) "+5V_L01_P008" (solid, pour order 8): 25.251,14.007 24.375,13.2 21.532,13.2 20.6,11.3 20.6,7.475 20.975,7.15 22,7.15 22.422,7.528 22.422,11.297 22.845,12.184 24.226,12.174 25.279,13.129
VBUS on L1 (SIGNAL) "VBUS_L01_P000" (solid, pour order 0): 27.256,12.997 26.705,12.997 26.568,13.134 26.568,15.655 26.573,15.655 26.719,15.8 30.579,15.8 30.579,15.319 28.153,15.319 27.938,15.104 27.938,13.189 27.751,13.002
GND on L2 (GND) "GND_L02_P011" (solid, pour order 11): 0.225,12.025 0.225,24.379 cw(c2.74,24.379) 2.74,26.894 31.302,26.894 cw(c31.302,24.379) 33.817,24.379 33.817,2.693 cw(c31.302,2.693) 31.302,0.179 2.751,0.179 cw(c2.751,2.693) 0.236,2.693 0.236,10.557
GND on L3 (GND) "GND_L03_P012" (solid, pour order 12): 0.223,12.071 0.223,24.425 cw(c2.738,24.425) 2.738,26.94 31.301,26.94 cw(c31.301,24.425) 33.815,24.425 33.815,2.74 cw(c31.301,2.74) 31.301,0.225 2.749,0.225 cw(c2.749,2.74) 0.235,2.74 0.235,10.603

## Silkscreen, mask and mechanical layers (free items; w line width, h text height)
Top Overlay:
  region: 919 vertices and 87 holes, not listed, extent 28.343,22.878 31.254,25.826
  text "SWD" at 17.475,21.2 h0.7 r90
  text "USB" at 28.8,21.175 h0.7
  text "GPIO" at 5.7,6.25 h0.7

## Text inside footprints (layer, text, board x,y; h text height)
D1: Mechanical 13 "+" at 30.992,1.867 h0.5 r90
D2: Mechanical 13 "+" at 15.117,14.258 h0.5